# Altium PCB Relay.PcbDoc
Units mm, origin at the board's own origin, x right, y up, seen from the top; angles counter-clockwise.
Board outline 74.55 x 54.36 mm, 4 copper layers (L-TOP, L-GND, L-POWER, Bottom Layer), stack 1 mm thick; 32 components, 27 nets, 97 pads, 3 vias.
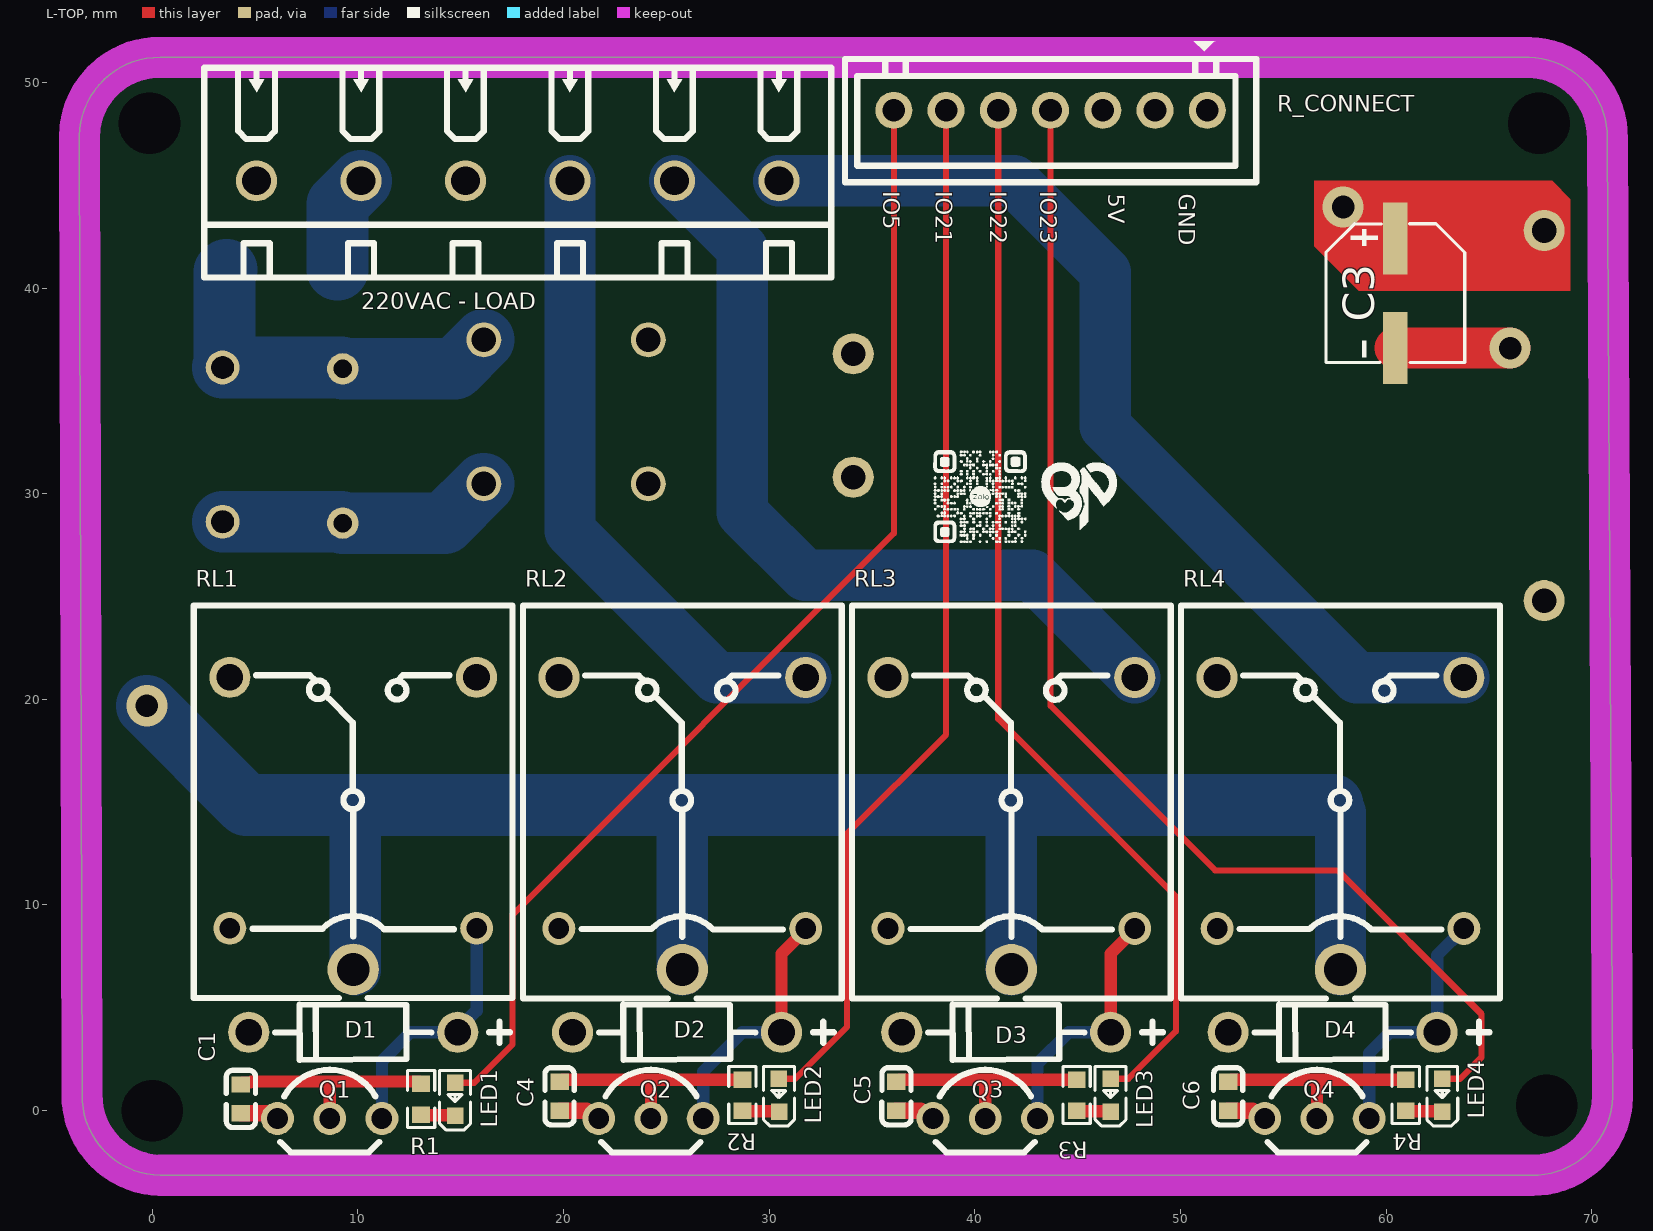
[diagram p0: L-TOP view]
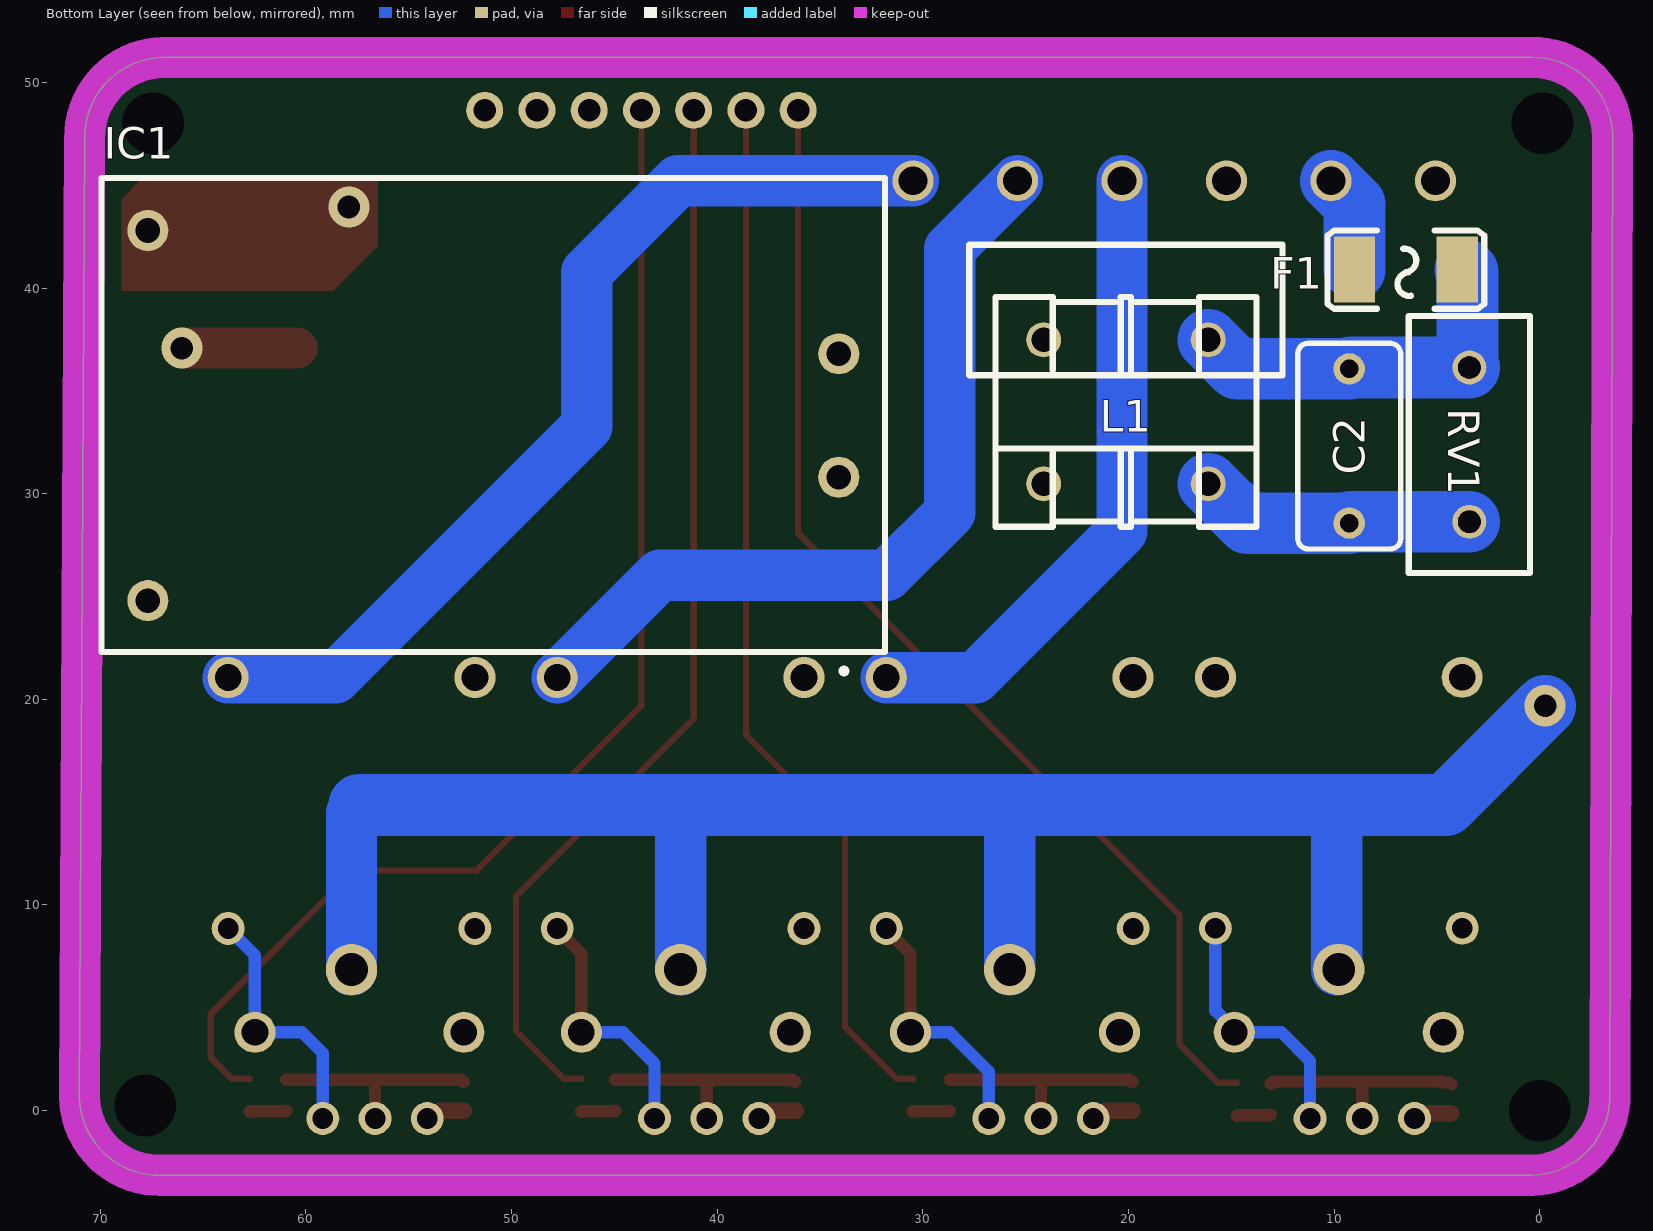
[diagram p1: Bottom Layer view, seen from below]
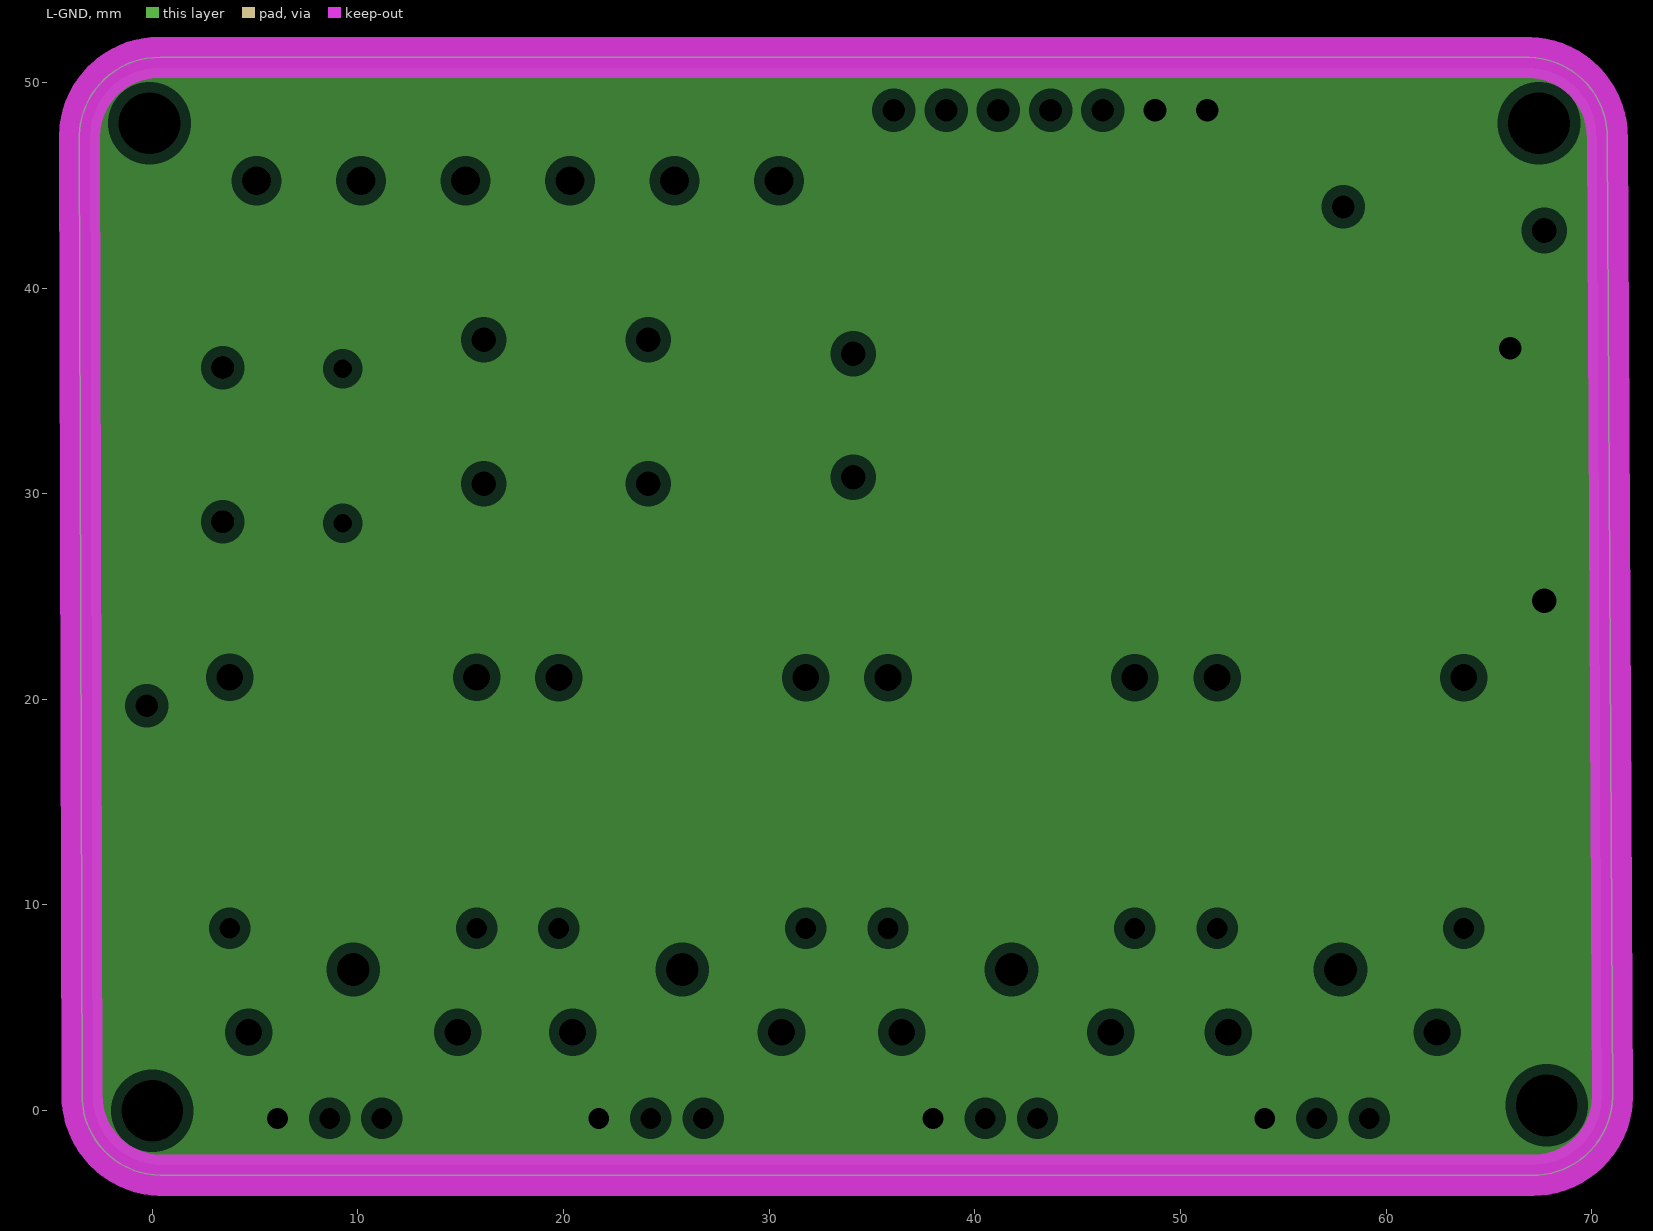
[diagram p2: L-GND, clearances drawn from the general rule]
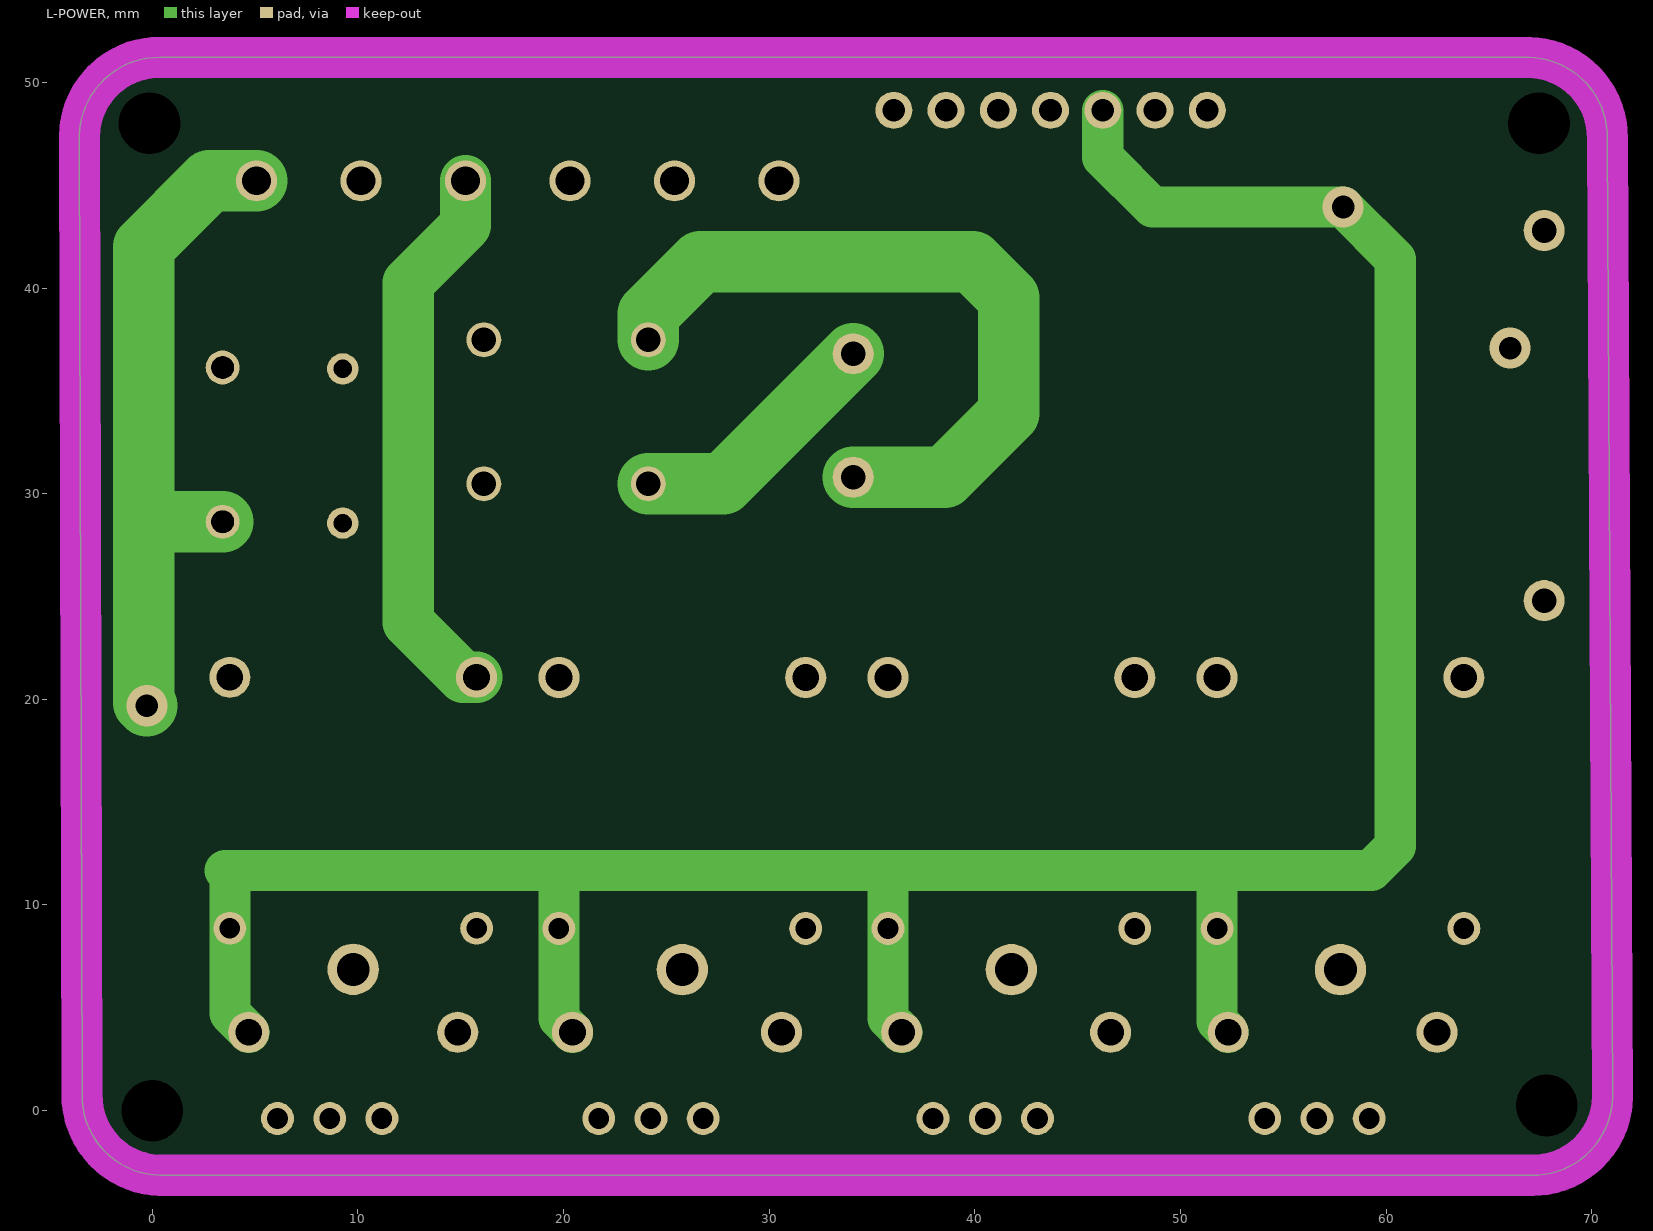
[diagram p3: L-POWER]
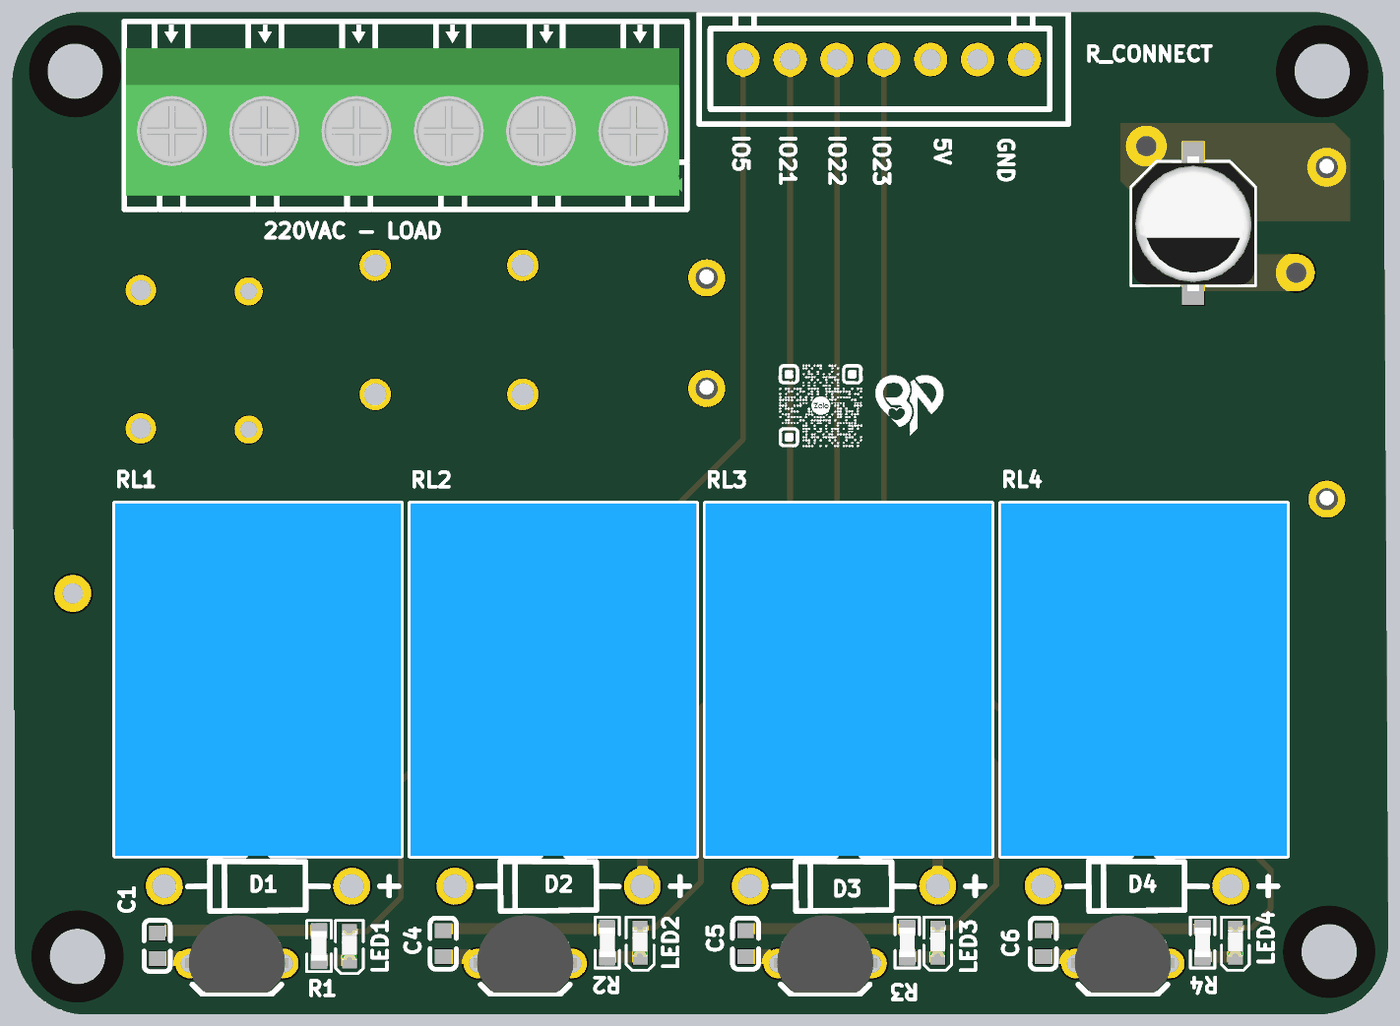
[diagram p4: 3D render of the assembled board from above, using the file's embedded part models]
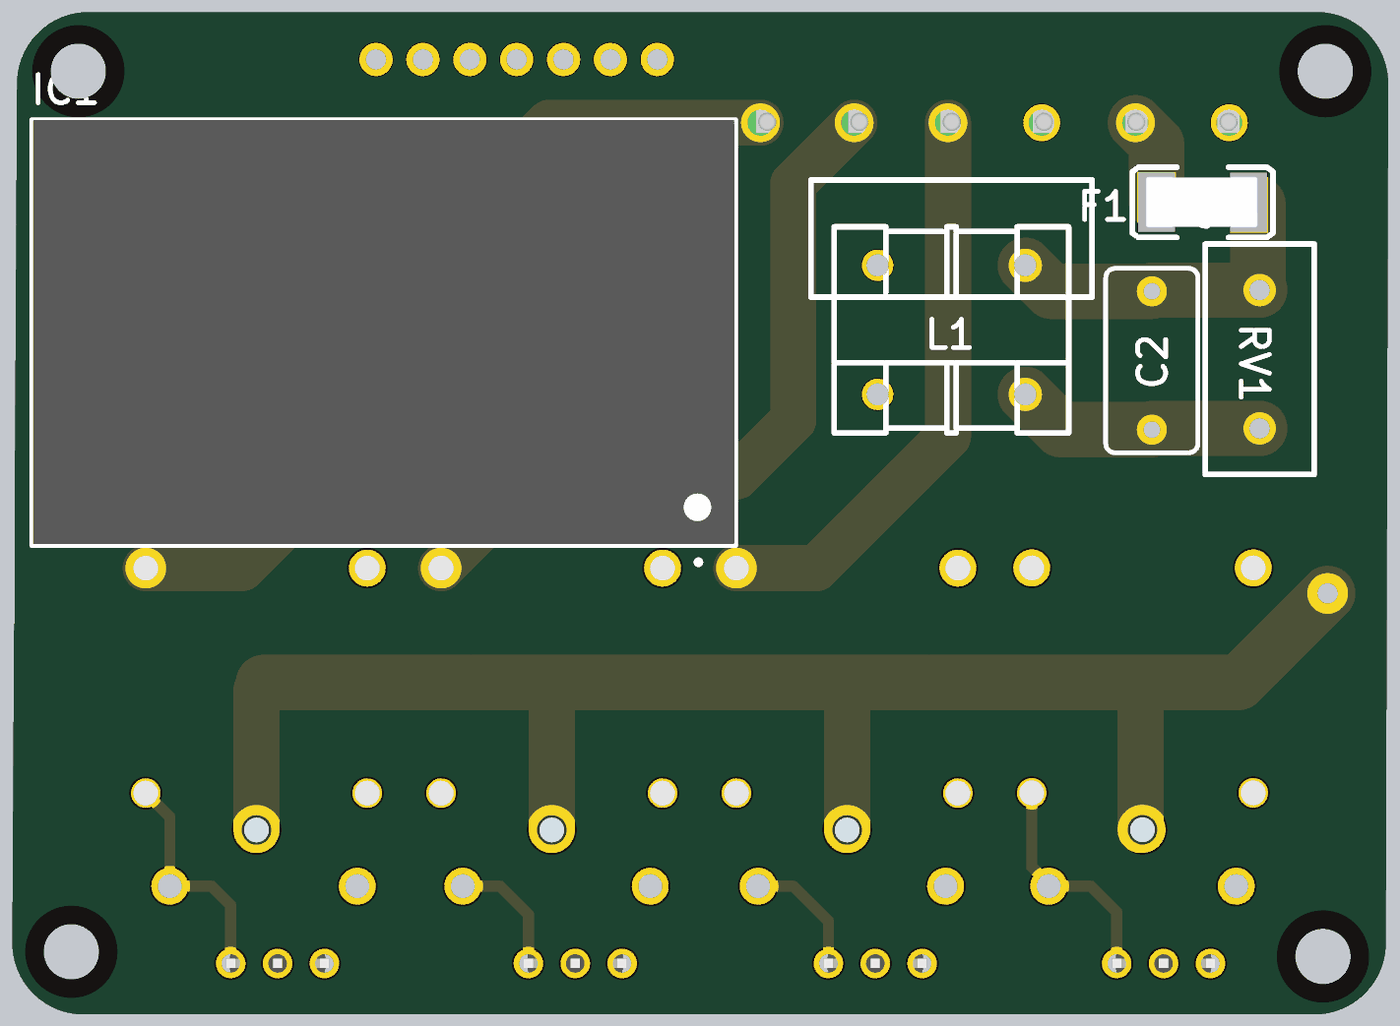
[diagram p5: 3D render of the assembled board from below, using the file's embedded part models]

## Layer stack, top to bottom
Top Solder: solder mask 0.0102, Solder Resist, Dk 3.5
L-TOP: signal copper 0.0356
Dielectric 1: core 0.32, FR-4, Dk 4.8
L-GND: plane copper 0.035, net GND
Dielectric 2: prepreg 0.2184, PP-023, Dk 4.5
L-POWER: signal copper 0.035
Dielectric 3: core 0.32, FR-4, Dk 4.5
Bottom Layer: signal copper 0.0356
Bottom Solder: solder mask 0.0102, Solder Resist, Dk 3.5

## Board outline
-3.406,0.793 -3.533,47.402 cw(c0.34,47.339) 0.404,51.212 66.952,51.212 cw(c66.888,47.339) 70.762,47.275 71.016,0.666 cw(c67.142,0.73) 67.079,-3.144 0.404,-3.144 cw(c0.467,0.73)

## Design rules (kind name [scope] priority, off if disabled: settings)
Clearance [All] p1: gap=0.5 ignorepadtopadclearanceinfootprint=FALSE
PlaneClearance [All] p1: clearance=0.508
PlaneConnect [All] p1: planeconnectstyle=Relief reliefexpansion=0.508 reliefentries=4 reliefconductorwidth=0.254 reliefairgap=0.254
PolygonConnect [All] p1: connectstyle=Relief reliefconductorwidth=1 reliefentries=4 polygonreliefangle="90 Angle" airgapwidth=0.5
RoutingVias RoutingVias_PWR [InNetClass('Power')] p1: holewidth=1.1 width=2 viastyle="Through Hole" minholewidth=1.1 minwidth=2 maxholewidth=1.1 maxwidth=2
RoutingVias [All] p2: holewidth=0.4 width=0.7 viastyle="Through Hole" minholewidth=0.4 minwidth=0.7 maxholewidth=0.4 maxwidth=0.7
SolderMaskExpansion [All] p1: expansion=0.102 istentingtop=FALSE
SupplyNets "Schematic Supply Nets" [InNet('GND')] p1: voltage=0.000
SupplyNets "Schematic Supply Nets_2" [InNet('5V')] p2: voltage=0.000
Width Width_Power [InNetClass('Power')] p1: maxlimit=3 minlimit=0.5 preferedwidth=2
Width Width_Signal [All] p2: maxlimit=3 minlimit=0.1 preferedwidth=1
28 further rules are at their usual default settings.

## Classes and differential pairs
net class Power: 5V AC(L) AC(N) GND

## Components (designator, comment, footprint, x,y, rotation, side; value= is the part's Value field where it differs from the comment)
"220VAC - LOAD" "6p" CONN-TH_6P-MX128-5.08-GN01-06P-CU-Y-A 18.016,45.612 r180 top (schematic designator CN1)
C1 "100nF" C0603 4.318,0.57 r90 top
C2 "100nf" CAP-TH_L10.0-W5.0-P7.50-D0.6 9.271,32.318 r270 bottom
C3 "220uF" CAP-SMD_BD6.3-L6.6-W6.6-FD 60.452,39.748 r270 top
C4 "100nF" C0603 19.812,0.697 r90 top
C5 "100nF" C0603 36.195,0.697 r90 top
C6 "100nF" C0603 52.324,0.697 r90 top
D1 "1N4007" DO-41_BD2.4-L4.7-P8.70-D0.9-RD 9.779,3.81 r0 top
D2 "1N4007" DO-41_BD2.4-L4.7-P8.70-D0.9-RD 25.527,3.81 r0 top
D3 "1N4007" DO-41_BD2.4-L4.7-P8.70-D0.9-RD 41.529,3.81 r0 top
D4 "1N4007" DO-41_BD2.4-L4.7-P8.70-D0.9-RD 57.404,3.81 r0 top
F1 "FUSE BRD MNT 1A 250VAC/VDC 2410" F2410 6.517,40.462 r180 bottom
IC1 "5W Ultra-small Series Module Power Supply" PWRM-TH_HLK-5M05 50.891,33.827 r0 bottom
L1 "10mH" FILTER-TH_UU9.8Y-10MH 20.13,35.68 r90 bottom
LED1 "XL-1608SURC-06" LED0603-RD_RED 14.732,0.508 r90 top
LED2 "XL-1608SURC-06" LED0603-RD_RED 30.48,0.699 r90 top
LED3 "XL-1608SURC-06" LED0603-RD_RED 46.607,0.699 r90 top
LED4 "XL-1608SURC-06" LED0603-RD_RED 62.736,0.699 r90 top
Q1 "2N2222" 2N2222 8.636,-0.381 r0 top
Q2 "2N2222" 2N2222 24.257,-0.381 r0 top
Q3 "2N2222" 2N2222 40.513,-0.381 r0 top
Q4 "2N2222" 2N2222 56.642,-0.381 r0 top
R1 "330Ω" R0603 13.081,0.562 r90 top
R2 "330Ω" R0603 28.702,0.753 r90 top
R3 "330Ω" R0603 44.958,0.753 r90 top
R4 "330Ω" R0603 60.96,0.753 r90 top
R_CONNECT "7p" CONN-TH_7P-P2.54_XH2.54-7P 41.827,43.254 r0 top (schematic designator H1)
RL1 "Relay 10A/12V" RL_10A_5V 9.779,13.97 r90 top value="Relay SPDT, 10A, 12V"
RL2 "Relay 10A/12V" RL_10A_5V 25.781,13.958 r90 top value="Relay SPDT, 10A, 12V"
RL3 "Relay 10A/12V" RL_10A_5V 41.783,13.958 r90 top value="Relay SPDT, 10A, 12V"
RL4 "Relay 10A/12V" RL_10A_5V 57.785,13.958 r90 top value="Relay SPDT, 10A, 12V"
RV1 "MOV-10D561K" MOV10D561K 3.429,32.385 r90 bottom

## Footprints (in the part's own frame and the unit in brackets; to place one, negate y for a bottom-side part, rotate by r counter-clockwise, add the part's x,y. Pads: shape width x height; smd on the part's side, far side on the other; paste and mask are expansions set on the pad)
2N2222 [mm] "TO-92 Bent Lead, Flat Index; 3 In-Line, Axial Leads; Body Dia. 4.5mm; Leads 0.51 x 0.48 mm (max)"
  round 1.6 hole 1 mask+0.1: 1(-2.54,0) 2(0,0)
  round 1.6 hole 1: 3(2.54,0)
  silkscreen extent -2.41,-1.65 2.41,2.37, body extent -2.79,-1.59 2.79,2.61, height 10
C0603 [mm] "cap 0603"
  rect 0.8x0.9 smd paste+0 mask+0.051: 1(-0.7,0) 2(0.7,0)
  silkscreen extent -1.39,-0.71 1.39,0.71, body extent -0.81,-0.4 0.79,0.4, height 0.8
CAP-SMD_BD6.3-L6.6-W6.6-FD [mm] "CAP ALUM 220uF ±20% 10V SMD"
  rect 3.5x1.2 smd paste+0 mask+0.051: 1(-2.67,0) 2(2.67,0)
  silkscreen extent -3.38,-3.38 3.38,3.38, body extent -3.63,-3.29 3.67,3.31, height 5.8
CAP-TH_L10.0-W5.0-P7.50-D0.6 [mil] "275V 100nF X2 ±10% Through Hole,P=7.5mm Ceramic Capacitors ROHS"
  round 60 hole 35.43 paste-99999 mask+2: 1(-147.64,0) 2(147.64,0)
  silkscreen extent -197,-98 197,98
CONN-TH_6P-MX128-5.08-GN01-06P-CU-Y-A [mm] "1x6P 12~24 10A Green -40℃~+105℃ 300V Through Hole 5.08mm 6 1 Through Hole,P=5.08mm Wire to Board ROHS"
  round 2 hole 1.4 paste-2539.97 mask+0.05: 1(-12.464,0.4) 2(-7.384,0.4) 3(-2.304,0.4) 4(2.776,0.4) 5(7.856,0.4) 6(12.936,0.4)
  silkscreen extent -15,-5.1 15.48,5.1, body extent -14.75,-3.65 15.4,4.35, height 10
CONN-TH_7P-P2.54_XH2.54-7P [mm] "XH 1x7P 7P Tin -25℃~+85℃ White 2.5mm 250V 7 2A 1 Through Hole Through Hole,P=2.5mm Headers, Male Pins ROHS"
  round 1.8 hole 1.1 paste-2539.97 mask+0.051: 1(9.481,5.387) 2(6.941,5.387) 3(4.401,5.387) 4(1.861,5.387) 5(-0.679,5.387) 6(-3.219,5.387) 7(-5.759,5.387)
  silkscreen extent -8.14,1.89 11.86,8.75, body extent -8.23,2.04 12.01,7.74, height 7
DO-41_BD2.4-L4.7-P8.70-D0.9-RD [mm] "30A 1kV 1.1V@1A 1A DO-41 Single Diodes ROHS"
  round 2 hole 1.3 mask+0.1: 1(-5.08,0) 2(5.08,0)
  silkscreen extent -3.8,-1.35 7.62,1.35, body extent -5.51,-1.36 5.51,1.36, height 2.72
F2410 [mm]
  rect 2x3.2 smd paste+0 mask+0.051: 1(-2.5,0.432) 2(2.5,0.432)
  silkscreen extent -3.81,-1.47 3.81,2.34, body extent -3.1,-0.95 3,1.84, height 2.57
FILTER-TH_UU9.8Y-10MH [mm]
  round 1.7 hole 1.2 paste-2539.97 mask+0.051: 1(1.8,-4) 2(-5.2,-4) 3(-5.2,4) 4(1.8,4)
  silkscreen extent -7.29,-7.62 6.43,7.62, body extent -7.05,-8.17 3.55,7.98, height 15.4
LED0603-RD_RED [mm] "LED RED"
  rect 0.8x0.8 smd paste+0 mask+0.051: 1(-0.75,-0.009) 2(0.849,-0.002)
  silkscreen extent -1.44,-0.75 1.44,0.75, body extent -0.7,-0.4 0.9,0.4, height 0.7
MOV10D561K [mm] "925V 460V 350V 560V Through Hole,P=7.5mm Varistors, MOVs ROHS"
  round 1.65 hole 1.1 slot 1.1 at 0 deg paste-2539.97 mask+0.051: 1(-3.75,0) 2(3.75,0)
  silkscreen extent -6.25,-2.95 6.25,2.95, body extent -5.37,-1.58 5.61,1.83, height 11
PWRM-TH_HLK-5M05 [mm] "AC/DC-DC DIP,38x23mm AC DC Converters ROHS"
  round 2 hole 1.2 paste-2539.97 mask+0.051: 1(-16.8,3.028) 2(-16.8,-2.971) 3(16.8,9.028) 4(16.8,-8.972)
  silkscreen extent -19.05,-11.53 19.05,12.56, body extent -19,-11.53 19,11.47, height 18.5
R0603 [mm] "Resister pakage 0603"
  rect 0.806x0.864 smd paste-100 mask+0.051: 1(-0.753,0) 2(0.753,0)
  silkscreen extent -1.39,-0.66 1.39,0.66, body extent -0.8,-0.43 0.8,0.43, height 0.48
RL_10A_5V [mm] "Relay SRD-05VDC-SL-C, 5 pin, 10A,19.1X15.5"
  round 2.5 hole 1.6: 1(-7.1,0)
  round 2 hole 1.3: 2(7.1,6) 3(7.1,-6)
  round 1.6 hole 1: 4(-5.1,-6) 5(-5.1,6)
  silkscreen extent -8.5,-7.75 10.6,7.75, body extent -8.5,-7.75 10.6,7.75, height 15.3

## Part data
"220VAC - LOAD": library part MX128-5.08-GN01-06P-CU-Y-A, "1x6P 12~24 10A Green -40℃~+105℃ 300V Through Hole 5.08mm 6 1 Through Hole,P=5.08mm Wire to Board ROHS"
C1 C4 C5 C6: library part CC0603KRX7R9BB104, "50V 100nF X7R ±10% 0603 Ceramic Capacitors ROHS"
C2: library part 100nF, "275V 100nF X2 ±10% Through Hole,P=7.5mm Ceramic Capacitors ROHS"
C3: library part RVT220UF10V67RV0037
D1 D2 D3 D4: "30A 1kV 1.1V@1A 1A DO-41 Single Diodes ROHS"
F1: library part JFC2410-1100TS, "50A Surface Mount Fuse 1A 2410 Fuses ROHS"
IC1: library part HLK-5M05, "AC/DC-DC DIP,38x23mm AC DC Converters ROHS"
L1: library part UU9.8Y-10MH, "10mH@1kHz 1.2Ω 2 Through Hole Common Mode Chokes ROHS"
LED1 LED2 LED3 LED4: "20mA 2.3V Red 50mW 0603 LED Indication - Discrete ROHS"
Q1 Q2 Q3 Q4: library part 2N2222A, "625mW 40V 40@500mA,10V 600mA NPN TO-92 Single Bipolar Transistors ROHS"
R1 R2 R3 R4: library part RC0603FR-07330RL, "100mW 330Ω 75V ±100ppm/℃ Thick Film Resistor ±1% 0603 Chip Resistor - Surface Mount ROHS"
R_CONNECT: library part WAFER-XH2.54-7PZZ, "XH 1x7P 7P Tin -25℃~+85℃ White 2.5mm 250V 7 2A 1 Through Hole Through Hole,P=2.5mm Headers, Male Pins ROHS"
RL1 RL2 RL3 RL4: library part "Relay 1", "Relay SPDT,10A - 5VDC 5 Pin"
RV1: "925V 460V 350V 560V Through Hole,P=7.5mm Varistors, MOVs ROHS"

## Free pads (board coordinates)
  round 0 hole 3 unplated mask+2.5: 4(-0.127,48.006) 4(0,0) 4(67.437,48.006) 4(67.818,0.254)

## Via types
v1: diameter 2, hole 1.1, L-TOP to Bottom Layer, 3 vias

## Nets (pads, with @x,y where several pads share a name; then routed paths per layer and width w, separated by ;. In a path a pad name is that pad's centre, name@x,y a point inside that pad or via, vN(x,y) a via of type N, cw(c..) or ccw(c..) an arc to the next point about the centre after c; other vN are vias at no path point)
5V: C3.1 D1.1 D2.1 D3.1 D4.1 IC1.4 R_CONNECT.3 RL1.5 RL2.5 RL3.5 RL4.5 | length 137.4
  L-POWER w2: D1.1 3.779,4.73 3.779,11.461 3.556,11.684 19.939,11.684 ; D2.1 19.781,4.476 19.781,11.526 19.939,11.684 ; D3.1 35.783,4.476 35.783,11.526 35.941,11.684 ; R_CONNECT.3 46.228,46.355 48.641,43.942 v1(57.912,43.942) 60.452,41.402 60.452,12.856 59.28,11.684 51.943,11.684 ; D4.1 51.785,4.349 51.785,11.526 51.943,11.684 ; 19.939,11.684 35.941,11.684 ; 35.941,11.684 51.943,11.684
AC(L): "220VAC - LOAD.5" F1.1 | length 4.8
  Bottom Layer w3: F1.1 9.017,44.069 10.16,45.212
AC(N): "220VAC - LOAD.6" C2.2 L1.2 RL1.1 RL2.1 RL3.1 RL4.1 RV1.1 | length 138.8
  L-POWER w3: v1(-0.254,19.685) -0.406,19.837 -0.406,28.635 ; RV1.1 -0.406,28.635 ; 5.08,45.212 2.794,45.212 -0.406,42.012 -0.406,28.635
  Bottom Layer w2.5: RL1.1@9.875,6.858 9.875,14.701 10.033,14.859 ; RL2.1 25.781,14.351 26.289,14.859 ; RL3.1 41.783,14.605 42.037,14.859 ; 57.404,14.859 57.785,14.478 RL4.1
  Bottom Layer w3: v1(-0.254,19.685) 4.572,14.859 10.033,14.859 26.289,14.859 42.037,14.859 57.404,14.859 ; RV1.1 9.204,28.635 C2.2 14.217,28.568 L1.2
COM1: "220VAC - LOAD.4" RL1.3 | length 27.1
  L-POWER w2.5: 15.24,45.212 15.24,43.053 12.446,40.259 12.446,23.749 15.125,21.07 RL1.3
COM2: "220VAC - LOAD.3" RL2.3 | length 31.4
  Bottom Layer w2.5: 20.32,45.212 20.32,28.194 27.456,21.058 RL2.3
COM3: "220VAC - LOAD.2" RL3.3 | length 39.9
  Bottom Layer w2.5: 25.4,45.212 28.702,41.91 28.702,29.083 31.75,26.035 42.806,26.035 RL3.3
COM4: "220VAC - LOAD.1" RL4.3 | length 47.7
  Bottom Layer w2.5: 30.48,45.212 41.91,45.212 46.355,40.767 46.355,33.274 58.571,21.058 RL4.3
GND: C1.1 C3.2 C4.1 C5.1 C6.1 IC1.3 Q1.1 Q2.1 Q3.1 Q4.1 R_CONNECT.1 R_CONNECT.2 | length 13.4
  L-TOP w0.8: C1.1 5.628,-0.13 5.88,-0.381 Q1.1 ; C4.1 21.122,-0.003 21.501,-0.381 Q2.1 ; C5.1 37.378,-0.003 37.757,-0.381 Q3.1 ; C6.1 53.507,-0.003 53.886,-0.381 Q4.1
  L-TOP w2: C3.2 v1(66.034,37.078)
IO5: LED1.2 R_CONNECT.7 | length 56.7
  L-TOP w0.3: LED1.2 15.661,1.357 17.526,3.222 17.526,9.525 36.068,28.067 R_CONNECT.7
IO21: LED2.2 R_CONNECT.6 | length 50.9
  L-TOP w0.3: LED2.2 31.266,1.548 33.782,4.064 33.782,13.462 38.608,18.288 R_CONNECT.6
IO22: LED3.2 R_CONNECT.5 | length 52.5
  L-TOP w0.3: R_CONNECT.5 41.148,19.05 49.784,10.414 49.784,3.858 47.474,1.548 LED3.2
IO23: LED4.2 R_CONNECT.4 | length 60.6
  L-TOP w0.3: R_CONNECT.4 43.688,19.685 51.689,11.684 57.658,11.684 64.643,4.699 64.643,2.588 63.603,1.548 LED4.2
NetC1_2: C1.2 Q1.2 R1.2 | length 10.9
  L-TOP w0.6: C1.2 4.418,1.37 4.771,1.37 4.819,1.418 8.509,1.418 ; Q1.2@8.794,-0.223 Q1.2 8.636,1.291 8.509,1.418 ; R1.2 12.978,1.418 8.509,1.418
NetC2_1: C2.1 F1.2 L1.1 RV1.2 | length 18.1
  Bottom Layer w3: F1.2@3.617,40.894 3.517,40.794 3.517,36.223 RV1.2 9.204,36.135 C2.1 14.717,36.068 L1.1
NetC4_2: C4.2 Q2.2 R2.2 | length 11.1
  L-TOP w0.6: C4.2 19.862,1.397 19.971,1.506 24.337,1.506 ; Q2.2@24.099,-0.223 Q2.2 24.257,1.427 24.337,1.506 ; R2.2 24.337,1.506
NetC5_2: C5.2 Q3.2 R3.2 | length 10.7
  L-TOP w0.6: C5.2 36.245,1.397 36.354,1.506 40.386,1.506 ; Q3.2 40.513,1.379 40.386,1.506 ; R3.2 40.386,1.506
NetC6_2: C6.2 Q4.2 R4.2 | length 10.6
  L-TOP w0.6: C6.2 52.374,1.397 52.483,1.506 56.722,1.506 ; Q4.2 56.642,1.427 56.722,1.506 ; R4.2 56.722,1.506
NetD1_2: D1.2 Q1.3 RL1.4 | length 12.7
  L-TOP w1: RL1.4@15.779,8.708 RL1.4
  Bottom Layer w0.6: Q1.3 11.176,2.413 12.573,3.81 D1.2 14.859,3.941 15.779,4.861 RL1.4
NetD2_2: D2.2 Q2.3 RL2.4 | length 12.4
  L-TOP w0.6: D2.2 30.607,7.628 31.781,8.802 RL2.4
  Bottom Layer w0.6: Q2.3 26.797,1.905 28.702,3.81 D2.2
NetD3_2: D3.2 Q3.3 RL3.4 | length 12.4
  L-TOP w0.6: D3.2 46.609,7.628 47.783,8.802 RL3.4
  Bottom Layer w0.6: Q3.3 43.053,2.286 44.577,3.81 D3.2
NetD4_2: D4.2 Q4.3 RL4.4 | length 12.5
  Bottom Layer w0.6: Q4.3 59.182,2.794 60.198,3.81 D4.2 62.484,7.557 RL4.4
NetIC1_1: IC1.1 L1.4 | length 35
  L-POWER w3: L1.4 24.13,38.735 26.67,41.275 39.899,41.275 41.656,39.518 41.656,33.909 38.546,30.799 IC1.1
NetIC1_2: IC1.2 L1.3 | length 12.6
  L-POWER w3: L1.3 27.772,30.48 IC1.2
NetLED1_1: LED1.1 R1.1 | length 1.7
  L-TOP w0.6: R1.1 13.106,-0.217 14.716,-0.217 LED1.1
NetLED2_1: LED2.1 R2.1 | length 1.8
  L-TOP w0.6: R2.1 28.727,-0.026 30.464,-0.026 LED2.1
NetLED3_1: LED3.1 R3.1 | length 1.7
  L-TOP w0.6: R3.1 44.983,-0.026 46.591,-0.026 LED3.1
NetLED4_1: LED4.1 R4.1 | length 1.8
  L-TOP w0.6: R4.1 60.985,-0.026 62.72,-0.026 LED4.1
pads on no net: RL1.2 RL2.2 RL3.2 RL4.2

## Polygon pours and split planes (outlines as drawn)
GND on L-GND (split plane): 0.395,50.703 0.404,50.702 66.952,50.702 66.954,50.702 67.128,50.696 67.367,50.67 67.604,50.628 67.836,50.568 68.064,50.492 68.286,50.4 68.501,50.293 68.708,50.17 68.905,50.033 69.092,49.882 69.268,49.719 69.432,49.543 69.582,49.356 69.72,49.158 69.842,48.952 69.95,48.737 70.042,48.515 70.117,48.287 70.177,48.054 70.22,47.818 70.245,47.579 70.254,47.339 70.252,47.284 70.251,47.275 70.251,47.274 70.251,47.273 70.505,0.664 70.505,0.662 70.499,0.49 70.474,0.251 70.431,0.014 70.371,-0.218 70.296,-0.446 70.204,-0.668 70.096,-0.883 69.974,-1.09 69.836,-1.287 69.686,-1.474 69.522,-1.65 69.346,-1.814 69.159,-1.964 68.962,-2.101 68.755,-2.224 68.54,-2.332 68.318,-2.424 68.09,-2.499 67.858,-2.559 67.621,-2.602 67.382,-2.627 67.142,-2.636 67.087,-2.634 67.079,-2.633 0.404,-2.633 0.401,-2.633 0.227,-2.627 -0.012,-2.602 -0.248,-2.559 -0.481,-2.499 -0.709,-2.424 -0.931,-2.332 -1.146,-2.224 -1.352,-2.101 -1.55,-1.964 -1.737,-1.814 -1.913,-1.65 -2.076,-1.474 -2.227,-1.287 -2.364,-1.09 -2.487,-0.883 -2.594,-0.668 -2.686,-0.446 -2.762,-0.218 -2.822,0.014 -2.864,0.251 -2.89,0.49 -2.898,0.73 -2.896,0.785 -2.897,0.785 -2.896,0.793 -2.896,0.794 -2.896,0.795 -3.023,47.404 -3.023,47.406 -3.017,47.579 -2.991,47.818 -2.949,48.054 -2.889,48.287 -2.813,48.515 -2.721,48.737 -2.614,48.952 -2.491,49.158 -2.354,49.356 -2.203,49.543 -2.04,49.719 -1.864,49.882 -1.677,50.033 -1.479,50.17 -1.273,50.293 -1.058,50.4 -0.836,50.492 -0.608,50.568 -0.375,50.628 -0.139,50.67 0.1,50.696 0.34,50.704

## Keep-outs
Keep-Out Layer:
  the board outline again, w2

## Other copper
L-TOP:
  region net 5V: 58.674,39.878 68.961,39.878 68.961,44.323 68.072,45.212 56.515,45.212 56.515,42.037

## Silkscreen, mask and mechanical layers (free items; w line width, h text height)
Top Overlay:
  drawing of 2236 lines, arcs and shapes, not listed
  text "IO5" at 35.56,44.704 h0.8 r270
  text "IO21" at 38.1,44.704 h0.8 r270
  text "IO22" at 40.767,44.704 h0.8 r270
  text "IO23" at 43.18,44.704 h0.8 r270
  text "5V" at 46.482,44.577 h0.8 r270
  text "GND" at 49.911,44.577 h0.8 r270

## Text inside footprints (layer, text, board x,y; h text height)
Q1: Mechanical 1 "C" at 11.036,-0.781 h0.8; Mechanical 1 "E" at 5.836,-0.781 h0.8; Mechanical 1 "B" at 8.436,-0.781 h0.8
Q2: Mechanical 1 "B" at 24.057,-0.781 h0.8; Mechanical 1 "E" at 21.457,-0.781 h0.8; Mechanical 1 "C" at 26.657,-0.781 h0.8
Q3: Mechanical 1 "B" at 40.313,-0.781 h0.8; Mechanical 1 "E" at 37.713,-0.781 h0.8; Mechanical 1 "C" at 42.913,-0.781 h0.8
Q4: Mechanical 1 "B" at 56.442,-0.781 h0.8; Mechanical 1 "E" at 53.842,-0.781 h0.8; Mechanical 1 "C" at 59.042,-0.781 h0.8
RL1: Mechanical 1 "1" at 10.379,6.67 h1.2 r90; Mechanical 1 "5" at 4.279,8.57 h1.2 r90; Mechanical 1 "4" at 16.379,8.47 h1.2 r90; Mechanical 1 "2" at 4.379,20.67 h1.2 r90; Mechanical 1 "3" at 16.479,20.67 h1.2 r90
RL2: Mechanical 1 "3" at 32.481,20.658 h1.2 r90; Mechanical 1 "2" at 20.381,20.658 h1.2 r90; Mechanical 1 "4" at 32.381,8.458 h1.2 r90; Mechanical 1 "5" at 20.281,8.558 h1.2 r90; Mechanical 1 "1" at 26.381,6.658 h1.2 r90
RL3: Mechanical 1 "3" at 48.483,20.658 h1.2 r90; Mechanical 1 "2" at 36.383,20.658 h1.2 r90; Mechanical 1 "4" at 48.383,8.458 h1.2 r90; Mechanical 1 "5" at 36.283,8.558 h1.2 r90; Mechanical 1 "1" at 42.383,6.658 h1.2 r90
RL4: Mechanical 1 "1" at 58.385,6.658 h1.2 r90; Mechanical 1 "5" at 52.285,8.558 h1.2 r90; Mechanical 1 "4" at 64.385,8.458 h1.2 r90; Mechanical 1 "2" at 52.385,20.658 h1.2 r90; Mechanical 1 "3" at 64.485,20.658 h1.2 r90